# Altium PCB 2017_CARTE_MOFSET.PCBDOC (part 2 of 2)
Units mil, origin at the board's own origin, x right, y up, seen from the top; angles counter-clockwise.
Board outline 3941 x 2642 mil, 4 copper layers (1-TOP, 2-SIGNAL, 3-GND, 4-BOTTOM); 139 components, 91 nets, 456 pads, 699 vias.
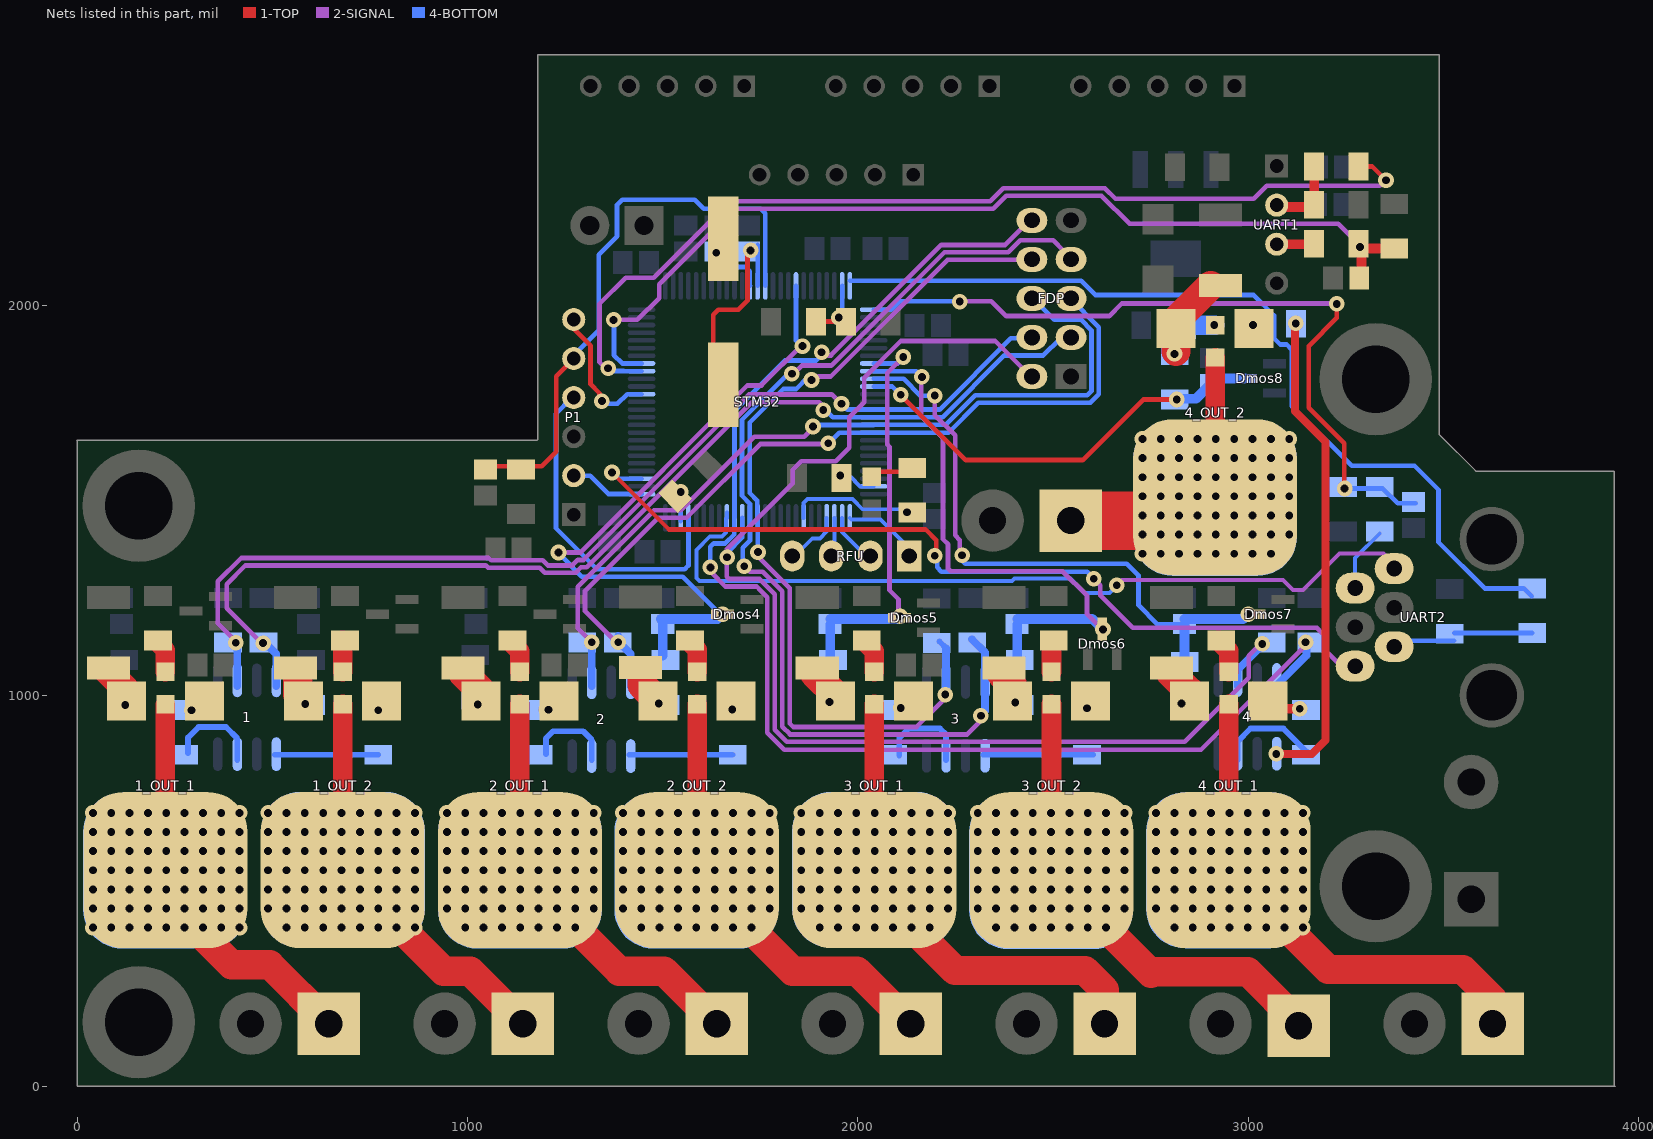
[diagram p4: the nets of this part, all layers, seen from the top]

## Via types
v1: diameter 40, hole 20, 1-TOP to 4-BOTTOM, 696 vias
v2: diameter 50, hole 20, 1-TOP to 4-BOTTOM, 3 vias

## Nets (pads, with @x,y where several pads share a name; then routed paths per layer and width w, separated by ;. In a path a pad name is that pad's centre, name@x,y a point inside that pad or via, vN(x,y) a via of type N, cw(c..) or ccw(c..) an arc to the next point about the centre after c; other vN are vias at no path point) (continued)
"MESURE MOSFET_4": Cmos4.2 Dmos4.3 Rmos4.2 STM32.18 | length 1733.2
  2-SIGNAL w12: v1(1233,1367) 1289.13,1367 1717.13,1795 1753,1795 v1@1857.5,1899.5
  4-BOTTOM w12: v1@1233,1365 1293,1305 1551,1305 1647,1209 v1(1653,1209) ; STM32.18@1841.43,2050.24 1841.43,1909.57 1850,1901 v1@1857,1901
  4-BOTTOM w25: Cmos4.2@1495,1196.54 1640.54,1196.54 v1(1653,1209) ; Rmos4.2@1500,1103 Cmos4.2@1500,1183.54
  other v1: 1858,1896
"MESURE MOSFET_5": Cmos5.2 Dmos5.3 Rmos5.2 STM32.33 | length 1057.7
  2-SIGNAL w12: v1@2108,1201 2108,1205 2104,1209 2104,1247 2081,1270 2081,1638 2075,1644 2075,1827 v1@2117,1869
  4-BOTTOM w12: STM32.33@2040.24,1851.43 2101.43,1851.43 v1@2118,1868
  4-BOTTOM w25: Rmos5.2@1929,1093 Cmos5.2@1929,1183.54 ; Cmos5.2@1929,1196.54 2100.54,1196.54 v1@2109,1205
  other v1: 2108,1204 2116,1868
"MESURE MOSFET_6": Cmos6.2 Dmos6.3 Rmos6.2 STM32.34 | length 1457.4
  2-SIGNAL w12: v1@2162,1815 2162,1716 2218,1660 2218,1401 2231,1388 2231,1326 2238,1319 2524,1319 2587,1256 2587,1209 v1@2627,1169
  4-BOTTOM w12: STM32.34@2040.24,1831.74 2149.26,1831.74 v1@2165,1816
  4-BOTTOM w25: Rmos6.2@2408,1095 Cmos6.2@2408,1183.54 ; Cmos6.2@2408,1196.54 2600.46,1196.54 v1@2628,1169
  other v1: 2628,1170 2164,1817
"MESURE MOSFET_7": Cmos7.2 Dmos7.3 Rmos7.2 STM32.35 | length 1551.3
  2-SIGNAL w12: v1@2197,1762 2197,1719 2249,1667 2249,1411 2261,1399 v1@2261,1355
  4-BOTTOM w12: STM32.35@2040.24,1812.06 2116.94,1812.06 2160,1769 v1@2195,1769 ; v1@2263,1350 2275,1338 2689,1338 2719,1308 2719,1232 2767.46,1183.54 Cmos7.2@2837,1183.54
  4-BOTTOM w25: Rmos7.2@2837,1094 Cmos7.2@2837,1183.54 ; Cmos7.2@2837,1196.54 2987.54,1196.54 v1(3000,1209)
  other v1: 2267,1360 2197,1769
"MESURE MOSFET_8": Cmos8.2 Dmos8.3 Rmos8.2 STM32.36 | length 1118.1
  1-TOP w12: v1@2109,1771 2276,1604 2576,1604 2731,1759 v1(2817,1759)
  4-BOTTOM w12: STM32.36@2040.24,1792.37 2087.63,1792.37 v1@2109,1771
  4-BOTTOM w25: Rmos8.2@2815,1761 2866,1761 2918,1813 Dmos8.3@2992.6,1813
  other v1: 2110,1771
MOSFET_1: 1.2 1_PWM_1.2 FDP.4 STM32.39 | length 2678.2
  2-SIGNAL w12: v1@407,1139 360,1186 360,1293 420,1353 1054.33,1353 1060.33,1347 1192.33,1347 1205.33,1334 1268.67,1334 1282.67,1348 1297,1348 1721,1772 1933,1772 v1@1958,1747
  4-BOTTOM w12: v1(1958,1748) 1972.68,1733.31 STM32.39@2040.24,1733.31 2209.32,1733.31 2392,1916 FDP.4@2448,1916
  4-BOTTOM w20: 1.2@410,1024.49 1_PWM_1.2@410,1135
  other v1: 406,1136
MOSFET_2: 1.4 1_PWM_2.2 FDP.3 STM32.40 | length 2788.2
  2-SIGNAL w12: v1@477,1133 474,1133 383,1224 383,1286 431,1334 1046.46,1334 1052.46,1328 1184.46,1328 1197.46,1315 1276.54,1315 1290.54,1329 1304.87,1329 1727.87,1752 1901,1752 v1@1913,1740
  4-BOTTOM w12: v1@1911,1738 1935.37,1713.63 STM32.40@2040.24,1713.63 2040.61,1714 2216.87,1714 2374.87,1872 2475,1872 2518,1915 FDP.3@2544,1915
  4-BOTTOM w20: 1_PWM_2.2@480.5,1136.5 510,1107 1.4@510,1024.49
  other v1: 476,1135 1911,1732
MOSFET_3: 2.2 2_PWM_1.2 FDP.6 STM32.41 | length 2115.7
  2-SIGNAL w12: v1(1318,1137) 1282,1173 1282,1279.26 1477.74,1475 1546,1475 1735,1664 1862,1664 v1@1887,1689
  4-BOTTOM w12: v1@1884,1689 v1(1885,1690) 1888.94,1693.94 STM32.41@2040.24,1693.94 STM32.41@2040.93,1694.63 ; STM32.41@2041,1694 2225,1694 2301,1770 2587.84,1770 2598.37,1780.53 2598.37,1936.68 2571.96,1963.09 2502.91,1963.09 FDP.6@2449,2017
  4-BOTTOM w20: 2.2@1318,1024.49 2_PWM_1.2@1318,1117
MOSFET_4: 2.4 2_PWM_2.2 FDP.5 STM32.42 | length 2115.2
  2-SIGNAL w12: v1@1381,1137 1301,1217 1301,1269 1488,1456 1560.87,1456 1749.87,1645 1925,1645 v1@1926,1646
  4-BOTTOM w12: v1@1925,1647 1952.26,1674.26 STM32.42@2040.24,1674.26 2232.13,1674.26 2308.87,1751 2595.71,1751 2617.37,1772.66 2617.37,1944.55 FDP.5@2543.92,2018
  4-BOTTOM w20: 2_PWM_2.2@1381,1137 v1(1386,1137) 2_PWM_2.2@1386,1139 ; 2_PWM_2.2@1386,1153 2_PWM_2.2@1386,1139 ; 2.4@1418,1024.49 1418,1107 2_PWM_2.2@1386,1139
  other v1: 1924,1647
MOSFET_5: 3.2 3_PWM_1.2 FDP.8 STM32.63 | length 2279.5
  2-SIGNAL w12: v1@1751,1369 1745,1369 1738.5,1362.5 1825,1276 1825,929 1834,920 2150,920 v1@2226,996 ; v1@1874,1818 1930.74,1818 2229.74,2117 FDP.8@2447,2117
  4-BOTTOM w12: v1@1743,1367 STM32.63@1743,1455.76 1742.35,1456.41 1742.35,1500.17 1723,1519.52 1723,1700.13 1808.87,1786 1842,1786 1872,1816 v1@1874,1816
  4-BOTTOM w15: 3_PWM_1.2@2209,1139 3_PWM_1.2@2226,1122
  4-BOTTOM w20: 3.2@2226,1024.49 3_PWM_1.2@2226,1122
  other v1: 2224,1003 1744,1368 1881,1809
MOSFET_6: 3.4 3_PWM_2.2 FDP.7 STM32.64 | length 2693
  2-SIGNAL w12: v1(1709,1332) 1723,1318 1756.13,1318 1806,1268.13 1806,921.13 1826.13,901 2280,901 2315,936 v1(2315,949) v1@2315,950 ; v1@1833,1823 1856,1846 1931.87,1846 2221.87,2136 2385,2136 2416,2167 2500,2167 2528,2139 2528,2136 FDP.7@2546,2118 FDP.7@2547,2117
  4-BOTTOM w12: v1(1709,1332) 1712,1335 1716,1335 1705,1346 1705,1379 1723.32,1397.31 STM32.64@1723.32,1455.76 1723.32,1492.33 1703,1512.65 1703,1707 1819,1823 v1@1834,1823
  4-BOTTOM w20: 3_PWM_2.2@2292,1145 2326,1111 2326,961 v1@2312,947
  other v1: 1831,1825
MOSFET_7: 4.2 4_PWM_1.2 FDP.2 STM32.65 | length 3358.2
  2-SIGNAL w12: FDP.2@2446,1815 2352,1909 2110,1909 2016,1815 2016,1752 1978,1714 1978,1636 1943,1601 1855,1601 1833,1579 1833,1545 1664,1376 1664,1305 1670,1299 1748.13,1299 1759,1288.13 1759.13,1288.13 1787,1260.26 1787,913.26 1818.26,882 2837,882 3001,1046 3001,1102 v1@3032,1133
  4-BOTTOM w12: v1(1665,1355) 1665,1367 1703.63,1405.63 STM32.65@1703.63,1455.76
  4-BOTTOM w20: 4.2@2973,1024.49 2973,1067 4_PWM_1.2@3044,1138
  other v1: 3036,1133
MOSFET_8: 4.4 4_PWM_2.2 FDP.10 STM32.66 | length 3578.3
  2-SIGNAL w12: v1@1624,1330 1624,1316 1660,1280 1740.26,1280 1751.13,1269.13 1751.26,1269.13 1768,1252.39 1768,905.39 1811.39,862 2879,862 v1@3152,1135 ; v1@1918,1872 1931,1872 2214,2155 2377,2155 2438,2216 FDP.10@2447,2216
  4-BOTTOM w12: v1(1622,1329) 1622,1382 1630.32,1390.32 1660.32,1390.32 1683.17,1413.17 1683.17,1454.98 STM32.66@1683.94,1455.76 1683.94,1729.94 1813,1859 1893,1859 v1@1902,1868
  4-BOTTOM w15: 4.4@3073,1024.49 4.4@3073,1027
  4-BOTTOM w20: 4.4@3073,1027 3149,1103 4_PWM_2.2@3149,1134
  other v1: 3147,1137 1907,1880
Net1_5: 1.5 1_R1_OUT_2.2 | length 265
  4-BOTTOM w15: 1.5@506,848.91 1_R1_OUT_2.2@771,848.91
Net1_7: 1.7 1_R1_OUT_1.1 | length 244.7
  4-BOTTOM w15: 1_R1_OUT_1.1@284,853 284,893 311,920 381,920 410,891 1.7@410,835.51
Net1_OUT_1_1: 1_OUT_1.1 1_R1_OUT_1.2
  other v1: 293,963
Net1_OUT_1_3: 1_OUT_1.3 RmesureMOS1.2 Rmos1.1 | length 96.3
  1-TOP w70: RmesureMOS1.2@78,1063 126,1015 1_OUT_1.3@126,986.54
  other v1: 123,976
Net1_OUT_2_1: 1_OUT_2.1 1_R1_OUT_2.1
  other v2: 771,963
Net1_OUT_2_3: 1_OUT_2.3 RmesureMOS2.2 Rmos2.1 | length 75
  1-TOP w75: RmesureMOS2.2@564.81,1053.9 564.81,1003.19 1_OUT_2.3@582,986
  other v2: 584,979
Net2_5: 2.5 2_R2_OUT_2.2 | length 265
  4-BOTTOM w15: 2.5@1414,848.91 2_R2_OUT_2.2@1679,848.91
Net2_7: 2.7 2_R2_OUT_1.1 | length 225.1
  4-BOTTOM w15: 2_R2_OUT_1.1@1201,851 1201,891 1219,909 1296,909 1318,887 2.7@1318,835.51
Net2_OUT_1_1: 2_OUT_1.1 2_R2_OUT_1.2 | length 31.2
  4-BOTTOM w25: 2_R2_OUT_1.2@1193,964 1209,964 1206,967 2_R2_OUT_1.2@1206,978
  other v2: 1207,964
Net2_OUT_1_3: 2_OUT_1.3 RmesureMOS3.2 Rmos3.1 | length 90.5
  1-TOP w75: RmesureMOS3.2@988,1058 1034,1012 2_OUT_1.3@1034,986.54
  other v1: 1026,978
Net2_OUT_2_1: 2_OUT_2.1 2_R2_OUT_2.1
  other v1: 1678,965
Net2_OUT_2_3: 2_OUT_2.3 RmesureMOS4.1 Rmos4.1 | length 90.4
  1-TOP w75: RmesureMOS4.1@1447,1060 1447,1027.54 2_OUT_2.3@1488,986.54
  other v1: 1490,980
Net3_5: 3.5 3_R3_OUT_2.2 | length 282
  4-BOTTOM w15: 3.5@2321,848.91 3_R3_OUT_2.2@2603,848.91
Net3_7: 3.7 3_R3_OUT_1.1 | length 246.1
  4-BOTTOM w15: 3_R3_OUT_1.1@2106,847 2106,892 2130,916 2210,916 2226,900 3.7@2226,835.51
Net3_OUT_1_1: 3_OUT_1.1 3_R3_OUT_1.2
  other v1: 2110,969
Net3_OUT_1_3: 3_OUT_1.3 RmesureMOS5.2 Rmos5.1 | length 92.4
  1-TOP w75: RmesureMOS5.2@1889,1057 1942,1004 3_OUT_1.3@1942,986.54
  other v1: 1927,984
Net3_OUT_2_1: 3_OUT_2.1 3_R3_OUT_2.1
  other v1: 2587,968
Net3_OUT_2_3: 3_OUT_2.3 RmesureMOS6.2 Rmos6.1 | length 81.1
  1-TOP w75: RmesureMOS6.2@2368,1056 2396,1028 3_OUT_2.3@2396,986.54
  other v1: 2403,983
Net4_5: 4.5 4_R4_OUT_2.2 | length 1240.8
  1-TOP w20: v1(3072,851) 3163,851 3198,886 3198,1651 3120,1729 v1@3120,1954
  other v1: 3122,1954
Net4_7: 4.7 4_R4_OUT_1.1 | length 270.6
  4-BOTTOM w15: 4.7@2973,835.51 2973,883 3006,916 3090,916 3149,857 4_R4_OUT_1.1@3149,848
Net4_OUT_1_1: 4_OUT_1.1 4_R4_OUT_1.2 | length 74
  1-TOP w25: 4_OUT_1.1@3058,967 v1(3132,967)
Net4_OUT_1_3: 4_OUT_1.3 RmesureMOS7.2 Rmos7.1 | length 92.8
  1-TOP w75: RmesureMOS7.2@2801,1059 2850,1010 4_OUT_1.3@2850,986.54
  other v1: 2829,980
Net4_OUT_2_1: 4_OUT_2.1 4_R4_OUT_2.1
  other v1: 3012,1950
Net4_OUT_2_3: 4_OUT_2.3 RmesureMOS8.1 Rmos8.1 | length 214.4
  1-TOP w12: RmesureMOS8.1@2904,2051 RmesureMOS8.1@2929.19,2051
  1-TOP w75: 4_OUT_2.3@2811,1960 2813,1960 RmesureMOS8.1@2904,2051 ; v1@2815,1883 4_OUT_2.3@2815,1941.54
  other v1: 2811,1876
NetC46_2: C46.2 STM32.12 Y1.2 | length 143.3
  4-BOTTOM w12: C46.2@1637,2136 1637.56,2136 1674.88,2098.68 1711.46,2098.68 1723,2087.14 1723,2050.56 STM32.12@1723.32,2050.24
  other v1: 1637,2135
NetC47_2: C47.2 STM32.13 Y1.1 | length 519.6
  1-TOP w12: Y1.1@1625,1804 1629,1808 1629,1976 1642,1989 1694,1989 1717,2012 1717,2135 1716,2136 1721,2141 v1(1725,2141)
  4-BOTTOM w12: C47.2@1718,2138 C47.2@1720,2136 ; STM32.13@1743,2050.24 C47.2@1743,2155
NetC49_2: C49.2 STM32.49 | length 80.4
  4-BOTTOM w10: v1@1970,1559 1984,1559 1992.81,1550.19 1992.81,1548.73 2005.08,1536.46 STM32.49@2040.24,1536.46
  other v1: 1955,1564
NetC50_2: C50.2 STM32.73 | length 107.2
  1-TOP w12: C50.2@1521.63,1501.63 1524.63,1501.63 C50.2@1546,1523
  4-BOTTOM w12: STM32.73@1546,1448 v1(1546,1522)
NetD1_1: D1.1 Rd1.2 | length 89.6
  1-TOP w50: Rd1.2@202,1141 226,1117 D1.1@226,1061.34
NetD2_1: D2.1 Rd2.2 | length 79.9
  1-TOP w50: D2.1@680,1062 Rd2.2@680,1141.91
NetD3_1: D3.1 Rd3.2 | length 80.9
  1-TOP w50: Rd3.2@1114,1134 1134,1114 D3.1@1134,1061.34
NetD4_1: D4.1 Rd4.2 | length 86.4
  1-TOP w50: Rd4.2@1567,1139 1588,1118 D4.1@1588,1061.34
NetD5_1: D5.1 Rd5.2 | length 82.4
  1-TOP w50: Rd5.2@2021,1135 2042,1114 D5.1@2042,1061.34
NetD6_1: D6.1 Rd6.2 | length 77.7
  1-TOP w50: D6.1@2496,1061.34 Rd6.2@2496,1139
NetD7_1: D7.1 Rd7.2 | length 91.8
  1-TOP w50: Rd7.2@2923,1142 2950,1115 D7.1@2950,1061.34
NetD8_1: D8.1 Rd8.2 | length 73.9
  4-BOTTOM w50: Rd8.2@2840.09,1949 v1@2914,1949
  other v1: 2913,1950
NetLedRun_1: LedRun.1 RledRun.1 | length 99.3
  1-TOP w12: LedRun.1@2037,1574.34 RledRun.1@2136.34,1574.34
NetRFU_1: RFU.1 STM32.51 | length 212.2
  4-BOTTOM w10: STM32.51@1979.22,1455.76 1982.98,1452 2058,1452 2135,1375 RFU.1@2135,1352
NetRFU_2: RFU.2 STM32.52 | length 137.4
  4-BOTTOM w10: STM32.52@1959.54,1455.76 1959.54,1419.46 RFU.2@2031,1348
NetRFU_3: RFU.3 STM32.53 | length 109.7
  4-BOTTOM w10: RFU.3@1939.85,1353.85 STM32.53@1939.85,1455.76 ; RFU.3@1945.5,1359.5 RFU.3@1951,1354
NetRFU_4: RFU.4 STM32.54 | length 151.7
  4-BOTTOM w10: RFU.4@1832,1352 1883,1403 1902.57,1403 1920,1420.43 1920,1455.59 STM32.54@1920.17,1455.76
NetRpuU1tx_1: RpuU1tx.1 RsU1tx.1 UART1.2 | length 192.9
  1-TOP w25: UART1.2@3079.91,2252.09 3168.91,2252.09 RpuU1tx.1@3168.91,2258 RsU1tx.1@3168.91,2356
NetRpuU2tx_1: RpuU2tx.1 RsU2tx.1 UART2.2 | length 358.6
  4-BOTTOM w12: UART2.2@3375,1125 3390.91,1140.91 RpuU2tx.1@3527,1140.91 ; RpuU2tx.1@3528,1160.91 RsU2tx.1@3728,1160.91
NetRsu1rx_2: Rsu1rx.2 UART1.3 | length 93
  1-TOP w25: UART1.3@3073,2157 Rsu1rx.2@3166,2157
NetRsu2rx_2: Rsu2rx.2 UART2.5 | length 166.1
  4-BOTTOM w10: UART2.5@3274,1276 3274,1353 Rsu2rx.2@3337,1416
OUT1: 1_Born_1.1 1_OUT_1.2 D1.2 pad.2@224.98,552.02 | length 975.5
  1-TOP w50: 1_OUT_1.2@226,554 D1.2@226,977
  1-TOP w75: 1_OUT_1.2@231,475 395,311 493,311 1_Born_1.1@644,160 1_Born_1.1@634.97,160
  other v1: 40,406 87,406 134,406 181,406 228,406 275,406 322,406 369,406 416,406 40,455 87,455 134,455 181,455 228,455 275,455 322,455 369,455 416,455 40,504 87,504 134,504 181,504 228,504 275,504 322,504 369,504 416,504 40,553 87,553 134,553 181,553 228,553 275,553 322,553 369,553 416,553 40,602 87,602 134,602 181,602 228,602 275,602 322,602 369,602 416,602 40,651 87,651 134,651 181,651 228,651 275,651 322,651 369,651 416,651 40,700 87,700 134,700 181,700 228,700 275,700 322,700 369,700 416,700
OUT2: 1_Born_2.1 1_OUT_2.2 D2.2 pad.2@680.98,554.02 | length 950.8
  1-TOP w50: 1_OUT_2.2@680,629 D2.2@680,978.66
  1-TOP w75: 1_OUT_2.2@696,537 938.5,294.5 1006.5,294.5 1_Born_2.1@1141,160
  other v1: 536,406 583,406 630,406 677,406 724,406 771,406 818,406 865,406 489,455 536,455 583,455 630,455 677,455 724,455 771,455 818,455 865,455 489,504 536,504 583,504 630,504 677,504 724,504 771,504 818,504 865,504 489,553 536,553 583,553 630,553 677,553 724,553 771,553 818,553 865,553 489,602 536,602 583,602 630,602 677,602 724,602 771,602 818,602 865,602 489,651 536,651 583,651 630,651 677,651 724,651 771,651 818,651 865,651 489,700 536,700 583,700 630,700 677,700 724,700 771,700 818,700 865,700
OUT3: 2_Born_1.1 2_OUT_1.2 D3.2 pad.2@1133.98,552.02 | length 1050
  1-TOP w50: 2_OUT_1.2@1134,557 D3.2@1134,978.66
  1-TOP w75: 2_OUT_1.2@1160,523 1388.5,294.5 1503.5,294.5 2_Born_1.1@1638,160
  other v1: 994,406 1041,406 1088,406 1135,406 1182,406 1229,406 1276,406 947,455 994,455 1041,455 1088,455 1135,455 1182,455 1229,455 1276,455 1323,455 947,504 994,504 1041,504 1088,504 1135,504 1182,504 1229,504 1276,504 1323,504 947,553 994,553 1041,553 1088,553 1135,553 1182,553 1229,553 1276,553 1323,553 947,602 994,602 1041,602 1088,602 1135,602 1182,602 1229,602 1276,602 1323,602 947,651 994,651 1041,651 1088,651 1135,651 1182,651 1229,651 1276,651 1323,651 947,700 994,700 1041,700 1088,700 1135,700 1182,700 1229,700 1276,700 1323,700
OUT4: 2_Born_2.1 2_OUT_2.2 D4.2 pad.2@1585.98,552.02 | length 1117.6
  1-TOP w50: 2_OUT_2.2@1588,558 D4.2@1588,978.66
  1-TOP w75: 2_OUT_2.2@1593,534 1832.5,294.5 1997.5,294.5 2132,160 2_Born_2.1@2135,160
  other v1: 1445,406 1492,406 1539,406 1586,406 1633,406 1680,406 1727,406 1398,455 1445,455 1492,455 1539,455 1586,455 1633,455 1680,455 1727,455 1774,455 1398,504 1445,504 1492,504 1539,504 1586,504 1633,504 1680,504 1727,504 1774,504 1398,553 1445,553 1492,553 1539,553 1586,553 1633,553 1680,553 1727,553 1774,553 1398,602 1445,602 1492,602 1539,602 1586,602 1633,602 1680,602 1727,602 1774,602 1398,651 1445,651 1492,651 1539,651 1586,651 1633,651 1680,651 1727,651 1774,651 1398,700 1445,700 1492,700 1539,700 1586,700 1633,700 1680,700 1727,700 1774,700
OUT5: 3_Born_1.1 3_OUT_1.2 D5.2 pad.2@2040.98,554.02 | length 1217.5
  1-TOP w50: 3_OUT_1.2@2042,553.46 D5.2@2042,978.66
  1-TOP w75: 3_OUT_1.2@2040,505 2249,296 2582,296 2632,246 3_Born_1.1@2632,160 3_Born_1.1@2632,153
  other v1: 1902,406 1949,406 1996,406 2043,406 2090,406 2137,406 2184,406 1855,455 1902,455 1949,455 1996,455 2043,455 2090,455 2137,455 2184,455 2231,455 1855,504 1902,504 1949,504 1996,504 2043,504 2090,504 2137,504 2184,504 2231,504 1855,553 1902,553 1949,553 1996,553 2043,553 2090,553 2137,553 2184,553 2231,553 1855,602 1902,602 1949,602 1996,602 2043,602 2090,602 2137,602 2184,602 2231,602 1855,651 1902,651 1949,651 1996,651 2043,651 2090,651 2137,651 2184,651 2231,651 1855,700 1902,700 1949,700 1996,700 2043,700 2090,700 2137,700 2184,700 2231,700
OUT6: 3_Born_2.1 3_OUT_2.2 D6.2 pad.2@2494.98,551.02 | length 1185.5
  1-TOP w50: 3_OUT_2.2@2496,595 D6.2@2496,978.66
  1-TOP w75: 3_OUT_2.2@2490.54,549.46 2751,289 ; 2756.46,293 2999,293 3_Born_2.1@3134,158
  other v1: 2354,406 2401,406 2448,406 2495,406 2542,406 2589,406 2636,406 2307,455 2354,455 2401,455 2448,455 2495,455 2542,455 2589,455 2636,455 2683,455 2307,504 2354,504 2401,504 2448,504 2495,504 2542,504 2589,504 2636,504 2683,504 2307,553 2354,553 2401,553 2448,553 2495,553 2542,553 2589,553 2636,553 2683,553 2307,602 2354,602 2401,602 2448,602 2495,602 2542,602 2589,602 2636,602 2683,602 2307,651 2354,651 2401,651 2448,651 2495,651 2542,651 2589,651 2636,651 2683,651 2307,700 2354,700 2401,700 2448,700 2495,700 2542,700 2589,700 2636,700 2683,700
OUT7: 4_Born_1.1 4_OUT_1.2 D7.2 pad.2@2947.98,553.02 | length 1303.5
  1-TOP w50: 4_OUT_1.2@2950,556 D7.2@2950,978.66
  1-TOP w75: 4_OUT_1.2@2950,553.46 3205,298.46 3549.54,298.46 3625,223 4_Born_1.1@3625,154
  other v1: 2811,406 2858,406 2905,406 2952,406 2999,406 3046,406 3093,406 3140,406 2764,455 2811,455 2858,455 2905,455 2952,455 2999,455 3046,455 3093,455 3140,455 2764,504 2811,504 2858,504 2905,504 2952,504 2999,504 3046,504 3093,504 3140,504 2764,553 2811,553 2858,553 2905,553 2952,553 2999,553 3046,553 3093,553 3140,553 2764,602 2811,602 2858,602 2905,602 2952,602 2999,602 3046,602 3093,602 3140,602 2764,651 2811,651 2858,651 2905,651 2952,651 2999,651 3046,651 3093,651 3140,651 2764,700 2811,700 2858,700 2905,700 2952,700 2999,700 3046,700 3093,700 3140,700
OUT8: 4_Born_2.1 4_OUT_2.2 D8.2 pad.2@2914.98,1507.02 | length 764.7
  1-TOP w50: 4_OUT_2.2@2915,1518 D8.2@2915,1866.66
  1-TOP w150: 4_Born_2.1@2545,1449 4_OUT_2.2@2961,1449
  other v1: 2729,1364 2776,1364 2823,1364 2870,1364 2917,1364 2964,1364 3011,1364 3058,1364 2729,1413 2776,1413 2823,1413 2870,1413 2917,1413 2964,1413 3011,1413 3058,1413 3105,1413 2729,1462 2776,1462 2823,1462 2870,1462 2917,1462 2964,1462 3011,1462 3058,1462 3105,1462 2729,1511 2776,1511 2823,1511 2870,1511 2917,1511 2964,1511 3011,1511 3058,1511 3105,1511 2729,1560 2776,1560 2823,1560 2870,1560 2917,1560 2964,1560 3011,1560 3058,1560 3105,1560 2729,1609 2776,1609 2823,1609 2870,1609 2917,1609 2964,1609 3011,1609 3058,1609 3105,1609 2729,1658 2776,1658 2823,1658 2870,1658 2917,1658 2964,1658 3011,1658 3058,1658 3105,1658
PA1_WHO_AM_I: RdwnWAmI.2 RupWAmI.1 STM32.24 | length 168.9
  1-TOP w12: RdwnWAmI.2@1883.09,1959 RupWAmI.1@1961,1959 ; v1@1937.91,1961 v1@1943,1961
  4-BOTTOM w12: v1@1951,1968 1959.93,1977.02 STM32.24@1959.54,2050.24
  other v1: 1951,1969
"PA2 GPIO_1": STM32.67 UART2.6 | length 2114.7
  2-SIGNAL w10: v1(2663,1283) 2677,1297 3089,1297 3115,1271 3140,1271 3234,1365 3347,1365 UART2.6@3383,1329
  4-BOTTOM w10: STM32.67@1664.26,1469.76 STM32.67@1664.26,1455.76 1662.48,1453.98 1662.48,1418.81 1651.99,1408.32 1620.32,1408.32 1586,1374 1586,1302 1594,1294 2395,1294 2401,1300 2545,1300 2582,1263 2645,1263 v1@2663,1281
"PA2 GPIO_2": STM32.78 UART2.1 | length 2239.3
  1-TOP w12: v1(1370,1572) 1516,1426 2174,1426 2201,1399 2201,1363 v1(2197,1359)
  2-SIGNAL w12: v1(2604,1300) 2621,1283 2621,1257 2704,1174 3176,1174 3200,1150 3200,1114 UART2.1@3238,1076
  4-BOTTOM w12: v1@1372,1571 1386.85,1556.15 STM32.78@1445.76,1556.15 ; v1@2203,1367 2203,1329 2214,1318 2587,1318 v1@2605,1300
PA2_U2RX: Cu2rx.2 RpuU2rx.1 Rsu2rx.1 STM32.26 | length 1972.3
  1-TOP w12: v1(3227,2004) 3227,1968 3155,1896 3155,1738 3246,1647 v1@3246,1532
  2-SIGNAL w12: v1(2261,2010) 2273,2010 2274,2011 2342,2011 2380.09,1972.91 2643.91,1972.91 2676,2005 v1@3230,2005
  4-BOTTOM w12: STM32.26@2040.24,1989.22 2085.38,1989.22 2106.69,2010.53 v1@2268,2010.53 ; v1(3247,1531) 3345,1531 3383,1493 Cu2rx.2@3429,1493
PA2_U2TX: RsU2tx.2 STM32.25 | length 2278.7
  4-BOTTOM w12: STM32.25@1979.6,2063.09 2571.96,2063.09 2608.05,2027 3013.32,2027 3066,1974.32 3066,1916.09 3082.09,1900 3099,1900 3112,1887 3112,1742 3265,1589 3426,1589 3487.5,1527.5 3487.5,1393.5 3606,1275 3706,1275 RsU2tx.2@3726,1255
PB6_U1TX: RsU1tx.2 STM32.92 | length 2504.3
  1-TOP w12: RsU1tx.2@3283.09,2356 3318,2356 v1(3353,2321) v1@3355,2319
  2-SIGNAL w12: v1@1359,1834 1338,1855 1338,2004 1405.25,2071.25 1477.25,2071.25 1673,2267 2339.13,2267 2372.13,2300 2633,2300 2660,2273 3014,2273 3048,2307 3337,2307 v1@3342,2312
  4-BOTTOM w12: v1@1362,1832 1400,1832 1399.74,1831.74 STM32.92@1445.76,1831.74
  other v1: 1360,1839
PB7_U1RX: Cu1rx.2 RpuU1rx.1 Rsu1rx.1 STM32.93 | length 2450.6
  1-TOP w25: Cu1rx.2@3290,2061 3290,2144.83 3291.09,2145.91 RpuU1rx.1@3374,2145.91
  2-SIGNAL w12: v1@1375,1963 1435,1963 1491,2019 1491,2054 1685,2248 2347,2248 2380,2281 2624,2281 2696,2209 3231,2209 v1@3288,2152
  4-BOTTOM w12: v1@1375,1957 1375,1873 1396.57,1851.43 STM32.93@1445.76,1851.43
  other v1: 1374,1963 3286,2150
PD10_LED_RUN: RledRun.2 STM32.57 | length 322.3
  4-BOTTOM w10: STM32.57@1861.11,1455.76 1861.11,1494.11 1871,1504 1986,1504 2012,1478 2116,1478 v1@2126,1468
  other v1: 2126,1470
PROG_NRST: Cnrst.2 P1.5 Rnrst.1 STM32.14 | length 1492.3
  1-TOP w12: Cnrst.2@1042,1588 1190,1588 1227,1625 1227,1819 P1.5@1272,1864 ; P1.5@1268,1858 P1.5@1274,1858
  4-BOTTOM w12: P1.5@1270,1862 1270,1870 1336,1936 1336,2130 1383,2177 1383,2258 1396,2271 1582,2271 1605,2248 1750.97,2248 1762.68,2236.28 STM32.14@1762.68,2050.24
PROG_SWCLK: P1.2 STM32.76 | length 200.3
  4-BOTTOM w12: P1.2@1265,1564 1314,1564 1361.22,1516.78 STM32.76@1445.76,1516.78
PROG_SWDIO: P1.4 STM32.72 | length 858.2
  4-BOTTOM w12: P1.4@1266,1762 1226.47,1722.47 1226.47,1429.09 1331.56,1324 1556,1324 1565.83,1333.83 STM32.72@1565.83,1455.76
PROG_SWO: P1.6 STM32.89 | length 364.1
  1-TOP w12: P1.6@1269,1964 1269,1943 1315,1897 1315,1798 1338,1775 v1@1338,1755
  4-BOTTOM w12: P1.6@1271,1947.44 P1.6@1271,1965 ; v1@1347,1748 1384,1748 1408.69,1772.69 STM32.89@1445.76,1772.69
  other v1: 1344,1755
pads on no net: STM32.1 STM32.2 STM32.3 STM32.4 STM32.5 STM32.7 STM32.8 STM32.9 STM32.23 STM32.29 STM32.30 STM32.31 STM32.32 STM32.37 STM32.38 STM32.43 STM32.46 STM32.55 STM32.56 STM32.58 STM32.59 STM32.60 STM32.61 STM32.62 STM32.68 STM32.69 STM32.70 STM32.71 STM32.77 STM32.79 STM32.80 STM32.81 STM32.82 STM32.83 STM32.84 STM32.85 STM32.86 STM32.87 STM32.88 STM32.95 STM32.96 STM32.97 STM32.98 UART2.FIX1 UART2.FIX2

## Polygon pours and split planes (outlines as drawn)
GND on 4-BOTTOM "4-BOTTOM-GND" (solid, pour order 7): 3932,1570 3932,5 5,5 5,1649 1181,1649 1185,1653 1186,2636 3485,2637 3485,1668 3582,1571
GND on 3-GND "3-GND" (solid, pour order 6): 3932,1570 3932,5 5,5 5,1649 1181,1649 1185,1653 1184,2635 3485,2635 3485,1668 3582,1571
24V on 2-SIGNAL "24V" (solid, pour order 8): 331,0 331,246 380,295 389,286 3403,286 3403,287 3517,401 3517,632 3515,632 3422,725 3423,726 3423,928 3593,1098 3589,1102 3589,1289 3486,1392 3332,1501 3089,1742 2649,1742 2451,1544 2451,1378 2426,1353 2425,1354 2313,1354 2252,1415 2252,1507 2253,1507 2478,1732 2482,1732 2480,1734 2722,1976 2724,1974 3484,1974 3484,1666 3580,1570 3934,1570 3932,1568 3932,4
GND on 1-TOP "1-TOP-GND" (solid, pour order 5): 3932,1570 3932,5 5,5 5,1649 1181,1649 1185,1653 1185,2637 3485,2637 3485,1668 3582,1571

## Keep-outs
Keep-Out Layer:
  lines w10: 0,0 0,1653.54 1181.1,1653.54 1181.1,2640 3488.19,2640 3488.19,1669.29 3582.68,1574.8 3937.01,1574.8 3937.01,0 0,0

## Silkscreen, mask and mechanical layers (free items; w line width, h text height)
Top Overlay:
  lines w3: 0,1068.99 1181.1,1068.99 ; 1181.1,1062.99 1181.1,1653.54 ; 3149.61,1574.8 3149.61,2640
  text "GND" at 1419,2335 h40
  text "1/1W" at 2915,2091 h30 r90
  text "MOS8" at 3086,1860 h35 r270
  text "FDP" at 2281,1657 h60 r90
  text "100k" at 1180,1601 h25 r270
  text "2.2n" at 1875,1598 h24
  text "2.2n" at 1512,1543 h24 r45
  text "RUN" at 1984,1500 h60 r180
  text "100n" at 1010,1489 h24 r90
  text "100n" at 940,1349 h24
  text "MOS8" at 2472,1319 h40
  text "24V" at 2291,1318 h40
  text "4,7k" at 1522,1295 h24
  text "4,7k" at 645,1294 h24
  text "4,7k" at 167,1293 h24
  text "4,7k" at 1073,1291 h24
  text "4,7k" at 2456,1290 h24
  text "4,7k" at 1979,1288 h24
  text "BAT54S" at 300,1285 h24
  text "4,7k" at 2890,1282 h24
  text "BAT54S" at 1205,1281 h24
  text "BAT54S" at 765,1280 h24
  text "BAT54S" at 1647,1276 h24
  text "BAT54S" at 2110,1268 h24
  text "BAT54S" at 2562,1218 h24
  text "1/1W" at 30,1145 h30
  text "1/1W" at 939,1144 h30
  text "1/1W" at 1849,1143 h30
  text "1/1W" at 1397,1141 h30
  text "1/1W" at 509,1140 h30
  text "1/1W" at 2753,1137 h30
  text "1/1W" at 2325,1135 h30
  text "100n" at 280,1114 h24
  text "100n" at 2087,1113 h24
  text "100n" at 1177,1112 h24
  text "BAT54S" at 3038,1090 h24
  text "MOS1" at 394,1000 h35 r270
  text "MOS2" at 848,1000 h35 r270
  text "MOS3" at 1306,1000 h35 r270
  text "MOS4" at 1760,1000 h35 r270
  text "MOS5" at 2213,1000 h35 r270
  text "MOS6" at 2663,1000 h35 r270
  text "MOS7" at 3122,1000 h35 r270
  text "24V" at 3699,715 h50 r90
  text "GND" at 3704,410 h50 r90
  text "24V" at 1378,29 h40
  text "MOS2" at 1073,27 h40
  text "MOS4" at 2071,27 h40
  text "24V" at 1869,26 h40
  text "24V" at 2381,26 h40
  text "24V" at 3368,26 h40
  text "24V" at 873,24 h40
  text "MOS3" at 1570,24 h40
  text "24V" at 2860,24 h40
  text "24V" at 385,22 h40
  text "MOS7" at 3556,22 h40
  text "MOS5" at 2561,21 h40
  text "MOS6" at 3059,21 h40
  text "MOS1" at 579,18 h40
Bottom Overlay:
  text "5V" at 1347,2263 h40
  text "GND" at 1506,2262 h40
  text "4,7k" at 2830,1993 h24
  text "BAT54S" at 3086,1715 h24
  text "ROBOT ESEO 2017" at 950,1581 h80
  text "8" at 2446,1515 h120
  text "CARTE MOSFET Courant" at 1107,1500 h80
  text "Tanguy S" at 701,1418 h80
  text "24V" at 3700,855 h50 r90
  text "GND" at 3705,549 h50 r90
  text "1" at 553,36 h120
  text "2" at 1055,36 h120
  text "3" at 1549,36 h120
  text "4" at 2044,36 h120
  text "5" at 2546,36 h120
  text "6" at 3042,36 h120
  text "7" at 3538,36 h120
  text "ROBOT ESEO 2016 CARTE MOSFET (8)" at 7535.98,-2239.98 h80 r90
  text "Sujeeth S." at 7617.98,-2608.98 h80 r90

## Dimensions
3940,0 to 3937.01,0 on Mechanical 15